# Allegro board PRISON_GOD_PCB_V235_SOMECHANGE.brd
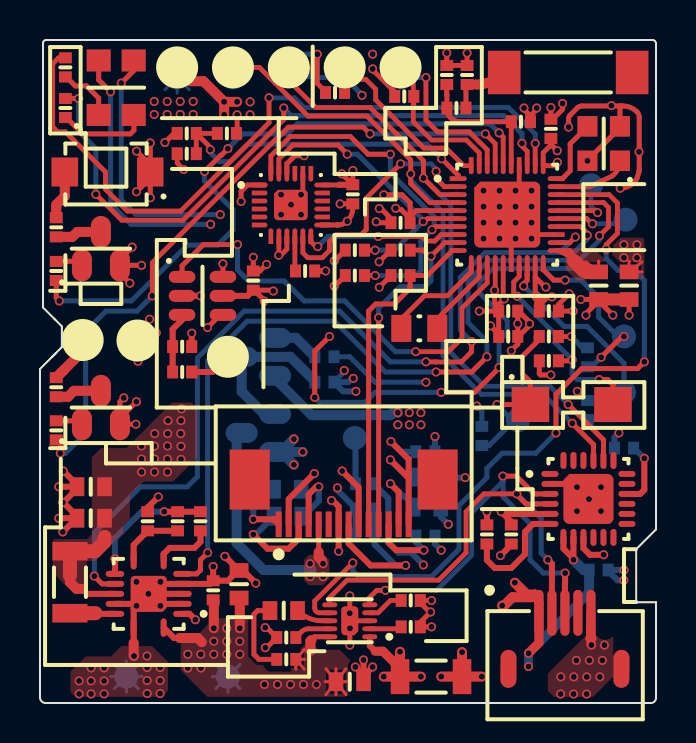
[diagram p0: board, top side]
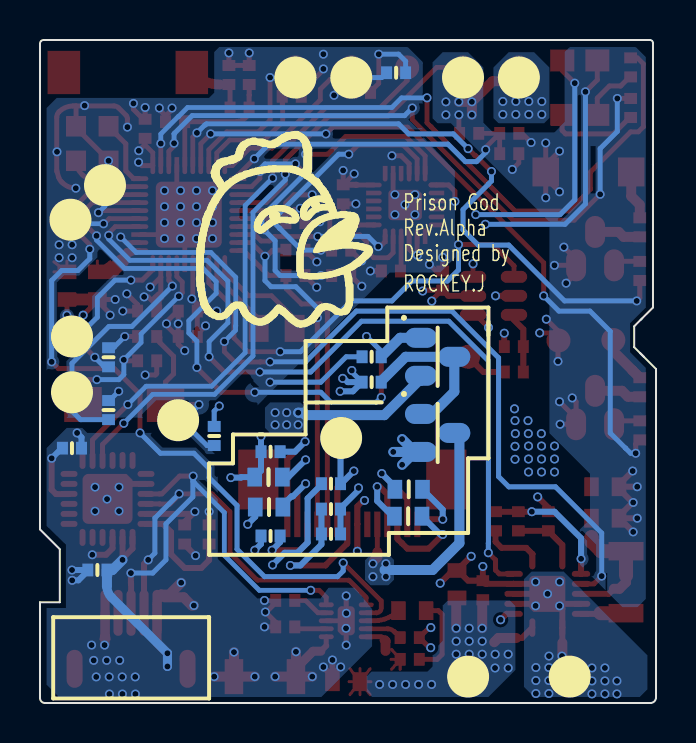
[diagram p1: board, bottom side, seen from below]

Outline 30.81 x 33.17 mm; copper layers: TOP, POWER SOURCE, GND, BOTTOM. Coordinates in mm from the lower left corner of the outline.
Outline path: 0.76,19.18 0.15,19.79 0.15,33.02 arc(0.2,33.13) 0.3,33.17 30.63,33.17 arc(30.76,33.12) 30.81,32.99 30.81,8.69 29.82,7.7 29.82,5.04 30.81,5.04 30.81,0.25 arc(30.74,0.07) 30.56,0 0.28,0 arc(0.08,0.08) 0,0.28 0,16.71 0.79,17.5 ; 0.71,19.23 1.09,18.85 1.09,17.81 0.61,17.32

## Design rules (mm)
constraint set DEFAULT: min track width 0.152

## Placement (name value [footprint] x y rotation side)
ANT  ANTENNA  [ANT700X200-2N]  26.42 31.55 0 top
BAT+  BAT+  [TESTPOINT120]  9.4 1.32 180 bottom
BAT-  BAT-  [TESTPOINT120]  4.32 1.32 180 bottom
C1  100n  [RESC_0402]  7.34 28.5 0 top
C2  2.2p  [RESC_0402]  20.83 29.77 180 top
C3  100n  [RESC_0402]  25.55 28.73 90 top
C4  1.0u  [RESC_0603]  29.46 20.88 90 top
C5  1.0u  [RESC_0402]  25.45 19.61 180 top
C6  100n  [RESC_0402]  25.45 18.34 0 top
C7  1.0u  [RESC_0402]  23.42 19.61 0 top
C8  100n  [RESC_0402]  23.42 18.34 0 top
C9  100n  [RESC_0402]  18.03 24.03 180 top
C10  0-75p  [RESC_0402]  7.11 17.83 0 top
C11  100n  [RESC_0402]  10.67 21.13 270 top
C12  1u  [RESC_0603]  12.37 10.69 180 bottom
C13  4.7u  [RESC_0603]  19.38 11.3 180 bottom
C14  1u  [RESC_0603]  12.4 9.35 180 bottom
C15  2.2u  [RESC_0603]  19.35 9.8 180 bottom
C16  4.7u  [RESC_0402]  16.26 9.7 180 bottom
C17  1u  [RESC_0603]  15.49 1.07 0 top
C18  4.7u  [RESC_0603]  9.96 5.94 90 top
C19  0.1u  [RESC_0402]  8.66 5.64 90 top
C20  10u  [RESC_0603]  2.54 9.25 0 top
C21  10u  [RESC_0603]  2.54 10.82 0 top
C22  100n  [RESC_0402]  13.26 21.62 0 top
C23  10UF  [RESC_1206]  19.56 1.32 180 top
C24  4.7u  [RESC_0402]  29.21 12.75 0 bottom
C25  100n  [RESC_0402]  23.57 8.43 90 top
C26  100n  [RESC_0402]  22.35 8.43 270 top
C27  1.0u  [RESC_0402]  27.94 6.65 180 bottom
C28  100n  [RESC_0402]  15.65 25.45 270 top
C29  100n  [RESC_0402]  19.28 12.57 0 bottom
C30  100n  [RESC_0402]  16.26 8.46 0 bottom
C31  100n  [RESC_0402]  27.38 14.66 270 bottom
C32  100n  [RESC_0402]  27.38 17.3 270 bottom
C33  100n  [RESC_0402]  18.22 30.35 0 top
C34  100n  [RESC_0402]  14.76 30.54 0 top
C35  100n  [RESC_0402]  22.1 13.36 270 bottom
C36  100n  [RESC_0402]  13 31.53 0 bottom
CHR_LED  LED  [RESC_0603]  12.19 4.62 180 top
DA_RES  BUTTON  [BUTTON300X400X200-2N]  26.59 14.94 0 top
EXT_3V_A  VCC_3V  [TESTPOINT120]  23.9 14.15 180 bottom
EXT_3V_B  VCC_3V  [TESTPOINT120]  15.24 31.29 180 bottom
INTA  INTA  [TESTPOINT120]  29.21 15.54 180 bottom
INTB  INTB  [TESTPOINT120]  29.21 18.34 180 bottom
INTC  INTC  [TESTPOINT120]  18.03 31.8 0 top
INTD  INTD  [TESTPOINT120]  15.24 31.8 0 top
J_GND  GND  [TESTPOINT120]  9.65 31.29 180 bottom
J_VCC  J_VCC  [TESTPOINT120]  6.86 31.29 180 bottom
L1  DNP  [RESC_0402]  21.36 31.42 90 top
L2  7.5n  [RESC_0402]  20.35 31.42 90 top
L3  3.9n  [RESC_0402]  24.05 29.08 0 top
L4  2.2u  [RESC_0603]  27.94 20.88 270 top
L5  4.7u  [RESC_1206]  1.5 6.05 90 top
LED  RED_GREEN  [RGB_COM_A_3528-4N]  3.81 30.78 90 top
NOREF  -  []  31.75 0.05 90 top
NOREF#2  -  []  0 0.05 0 top
NOREF#3  -  []  0.25 33.55 0 top
NOREF#4  -  []  0 0.05 0 top
PAD  PAD  [TESTPOINT120]  9.4 17.32 0 top
Q1  SI2302DS  [SOT95P237X112-3N]  3.05 22.73 90 top
Q2  SI2302DS  [SOT95P237X112-3N]  3.05 14.78 90 top
Q3  Si2301BDS  [SOT95P237X112-3N]  10.92 13.51 180 bottom
Q4  SI2302DS  [SOT95P237X112-3N]  10.92 17.32 180 bottom
R1  10k  [RESC_0402]  9.35 28.5 0 top
R2  10k  [RESC_0402]  7.34 27.48 0 top
R3  10k  [RESC_0402]  18.03 21.39 180 top
R4  10k  [RESC_0402]  18.03 22.66 180 top
R5  10k  [RESC_0402]  15.75 22.66 0 top
R6  10k  [RESC_0402]  15.75 21.39 0 top
R7  3K3  [RESC_0402]  25.45 17.12 0 top
R8  100  [RESC_0402]  0.81 23.8 270 top
R9  100  [RESC_0402]  0.81 15.8 270 top
R10  100  [RESC_0402]  1.27 31.8 90 top
R11  100  [RESC_0402]  1.27 29.77 90 top
R12  100  [RESC_0402]  0.81 21.62 90 top
R13  100  [RESC_0402]  0.81 13.64 90 top
R14  1-10k  [RESC_0402]  7.11 16.56 180 top
R15  47k  [RESC_0402]  14.22 16.05 180 bottom
R16  47k  [RESC_0402]  14.22 17.32 180 bottom
R17  10k  [RESC_0402]  16.26 10.97 180 bottom
R18  560k  [RESC_0402]  19.28 8.36 180 bottom
R19  500  [RESC_0402]  18.54 3.81 180 top
R20  250  [RESC_0402]  18.54 5.13 0 top
R21  10k  [RESC_0402]  12.32 3.28 180 top
R22  1.5k  [RESC_0402]  12.32 2.18 0 top
R23  158k  [RESC_0402]  8.03 9.09 90 top
R24  90k  [RESC_0402]  5.38 9.09 90 top
R25  15k  [RESC_0402]  6.88 9.09 270 top
RES  RES  [TESTPOINT120]  15.75 13.26 180 bottom
RXD  RX  [TESTPOINT120]  9.65 31.8 0 top
SOUNDER  R  [DET402_450X300-2N]  3.38 26.57 180 top
SWCLK  SWCLK  [TESTPOINT120]  27.56 25.91 180 bottom
SWDIO  SWDIO  [TESTPOINT120]  29.29 24.18 180 bottom
TXD  TX  [TESTPOINT120]  12.45 31.8 0 top
U1  DA14583_QFN40  [QFN40P500X500X80-41N]  23.37 24.43 0 top
U2  ASC0111B  [SOT95P237X292-6N]  8.13 20.37 0 top
U3  OLED_DIS_64_32  [FPC14N_1280X670X200-16N]  11.94 8.94 180 top
U4  BQ24050  [SON40P200X200X80-11N]  15.49 4.11 180 top
U5  TPS62736_PVQFN14  [QFN14P350X350X80-15N_DEBUG]  5.44 5.46 180 top
U6  MPU9250  [QFN24P300X300X100-25N_NEW]  12.55 24.92 0 top
U7  CP2104_QFN24  [QFN24P400X400X80-25N]  27.43 10.21 0 top
U_GND  GND  [TESTPOINT120]  6.86 31.8 0 top
USB  MICRO USB  [MICROUSB_NEW]  22.56 -0.89 0 top
VM+  VM+  [TESTPOINT120]  4.88 18.14 0 top
VM-  VM-  [TESTPOINT120]  2.13 18.16 0 top
VPP  VPP  [TESTPOINT120]  18.03 31.29 180 bottom
Y1  16MHZ  [OSCCC200X250X90-4N]  28.19 27.99 180 top
Y2  32KHZ  [OSCCC200X120X60-2N]  18.97 18.75 0 top

## Library data of the parts
ANT = ANTENNA_0
BAT+ BAT- EXT_3V_A EXT_3V_B INTA INTB INTC INTD J_GND J_VCC PAD RES RXD SWCLK SWDIO TXD U_GND VM+ VM- VPP = TEST POINT
C1-C22 C24-C36 = CAP NP
C23 = CAP
CHR_LED = LED
DA_RES = SW PUSHBUTTON
L1-L5 = INDUCTOR
LED = LED BI-COLOUR_0
Q1 Q2 Q4 = MOSFET_I_EN_GSD: room: motor
Q3 = Si2301BDS_0
R1-R25 SOUNDER = R
U1 = DA14583_QFN40
U2 = ASC0111B_0
U3 = OLED_DIS_64_0
U4 = BQ24050
U5 = TPS62736_PVQFN14_2
U6 = MPU9250_1
U7 = CP2104_QFN24_0
USB = MICROUSB_1
Y1 = CRYSTAL14_0
Y2 = CRYSTAL

## Footprints (pads in the part's own frame, mm; a bottom-side part is the same pattern mirrored in y, then rotated)
ANT700X200-2N
  rect 1.625x2.17 smd: 1(-3.2,0) 2(3.2,0)
BUTTON300X400X200-2N
  rect 1.875x1.75 smd: 1(-2.062,0) 2(2.062,0)
DET402_450X300-2N
  rect 1.325x1.45 smd: 1(-2.138,0) 2(2.138,0)
FPC14N_1280X670X200-16N
  rect 0.3x1.28 smd: 1(0,0) 2(-0.5,0) 3(-1,0) 4(-1.5,0) 5(-2,0) 6(-2.5,0) 7(-3,0) 8(-3.5,0) 9(-4,0) 10(-4.5,0) 11(-5,0) 12(-5.5,0) 13(-6,0) 14(-6.5,0)
  rect 2x3 smd: M1(-7.95,-2.24) M2(1.45,-2.24)
MICROUSB_NEW
  round 0 hole 0.6: (1.7,4.5) (5.7,4.5)
  oval 0.46x2.3 smd: 1(2.4,5.4) 2(3.05,5.4) 3(3.7,5.4) 4(4.35,5.4) 5(5,5.4)
  oval 1.9x0.8 smd rot 89.7: 6(6.525,2.6) 7(0.875,2.6)
OSCCC200X120X60-2N
  rect 1x1.35 smd: 1(-0.9,0) 2(0.9,0)
OSCCC200X250X90-4N
  rect 1x1.025 smd: 1(-0.812,0.863) 2(-0.812,-0.863) 3(0.812,-0.863) 4(0.812,0.863)
QFN14P350X350X80-15N_DEBUG
  oval 0.3x0.925 smd: 1(-0.75,1.688) 7(-0.75,-1.688) 8(0.75,-1.688) 14(0.75,1.688)
  oval 0.925x0.3 smd: 2(-1.688,1) 3(-1.688,0.5) 4(-1.688,0) 5(-1.688,-0.5) 6(-1.688,-1) 9(1.688,-1) 10(1.688,-0.5) 11(1.688,0) 12(1.688,0.5) 13(1.688,1)
  custom 1.8x1.8 smd: 15(0,0)
QFN24P300X300X100-25N_NEW
  custom 0.78x0.235 smd: 1(-1.563,1) 2(-1.563,0.6) 3(-1.563,0.2) 4(-1.563,-0.2) 5(-1.563,-0.6) 6(-1.563,-1) 13(1.563,-1) 14(1.563,-0.6) 15(1.563,-0.2) 16(1.563,0.2) 17(1.563,0.6) 18(1.563,1)
  custom 0.235x0.78 smd: 7(-1,-1.563) 8(-0.6,-1.563) 9(-0.2,-1.563) 10(0.2,-1.563) 11(0.6,-1.563) 12(1,-1.563) 19(1,1.563) 20(0.6,1.563) 21(0.2,1.563) 22(-0.2,1.563) 23(-0.6,1.563) 24(-1,1.563)
  custom 1.68x1.52 smd: 25(0,0)
QFN24P400X400X80-25N
  oval 0.85x0.3 smd: 1(-1.925,1.25) 2(-1.925,0.75) 3(-1.925,0.25) 4(-1.925,-0.25) 5(-1.925,-0.75) 6(-1.925,-1.25) 13(1.925,-1.25) 14(1.925,-0.75) 15(1.925,-0.25) 16(1.925,0.25) 17(1.925,0.75) 18(1.925,1.25)
  oval 0.3x0.85 smd: 7(-1.25,-1.925) 8(-0.75,-1.925) 9(-0.25,-1.925) 10(0.25,-1.925) 11(0.75,-1.925) 12(1.25,-1.925) 19(1.25,1.925) 20(0.75,1.925) 21(0.25,1.925) 22(-0.25,1.925) 23(-0.75,1.925) 24(-1.25,1.925)
  custom 2.5x2.5 smd: 25(0,0)
QFN40P500X500X80-41N
  custom 0.85x0.235 smd: 1(-2.45,1.8) 2(-2.45,1.4) 3(-2.45,1) 4(-2.45,0.6) 5(-2.45,0.2) 6(-2.45,-0.2) 7(-2.45,-0.6) 8(-2.45,-1) 9(-2.45,-1.4) 10(-2.45,-1.8) 21(2.45,-1.8) 22(2.45,-1.4) 23(2.45,-1) 24(2.45,-0.6) 25(2.45,-0.2) 26(2.45,0.2) 27(2.45,0.6) 28(2.45,1) 29(2.45,1.4) 30(2.45,1.8)
  custom 0.235x0.85 smd: 11(-1.8,-2.45) 12(-1.4,-2.45) 13(-1,-2.45) 14(-0.6,-2.45) 15(-0.2,-2.45) 16(0.2,-2.45) 17(0.6,-2.45) 18(1,-2.45) 19(1.4,-2.45) 20(1.8,-2.45) 31(1.8,2.45) 32(1.4,2.45) 33(1,2.45) 34(0.6,2.45) 35(0.2,2.45) 36(-0.2,2.45) 37(-0.6,2.45) 38(-1,2.45) 39(-1.4,2.45) 40(-1.8,2.45)
  custom 3.3x3.3 smd: 41(0,0)
RESC_0402
  rect 0.55x0.64 smd: 1(-0.477,0) 2(0.477,0)
RESC_0603
  rect 0.73x0.94 smd: 1(-0.69,0) 2(0.69,0)
RESC_1206
  rect 0.925x1.75 smd: 1(-1.55,0) 2(1.55,0)
RGB_COM_A_3528-4N
  rect 1.1x1.2 smd: 1(-1.363,0.875) 2(-1.363,-0.875) 3(1.363,-0.875) 4(1.363,0.875)
SON40P200X200X80-11N
  oval 0.75x0.24 smd: 1(-1,0.8) 2(-1,0.4) 3(-1,0) 4(-1,-0.4) 5(-1,-0.8) 6(1,-0.8) 7(1,-0.4) 8(1,0) 9(1,0.4) 10(1,0.8)
  custom 0.85x1.45 smd: 11(0,0)
SOT95P237X112-3N
  oval 1.6x1 smd: 1(-0.835,0.95) 2(-0.835,-0.95) 3(0.835,0)
SOT95P237X292-6N
  oval 1.325x0.6 smd: 1(-1.022,0.95) 2(-1.022,0) 3(-1.022,-0.95) 4(1.022,-0.95) 5(1.022,0) 6(1.022,0.95)
TESTPOINT120
  round 1.2 smd: 1(0,0)

## Nets
GND: BAT-.1 C1.1 C3.2 C4.2 C5.1 C6.2 C7.2 C8.2 C9.2 C10.2 C11.1 C13.1 C15.1 C16.2 C17.2 C18.2 C19.2 C20.1 C21.1 C22.2 C23.1 C24.1 C25.1 C26.1 C27.1 C28.1 C29.2 C30.1 C31.1 C32.1 C33.1 C34.1 C35.1 C36.1 J_GND.1 L1.2 L2.2 L3.2 Q1.2(S) Q2.2(S) Q4.2(S) R1.2 R7.1 R16.1 R18.1 R19.1 R20.2 R21.2 R24.2 U1.16 U1.23 U1.34 U1.41 U2.2 U2.4 U2.6 U3.7(VSS) U4.3(VSS) U4.11 U5.2 U5.3 U5.4 U5.5 U5.12(VSS) U5.14 U5.15 U6.18 U6.20 U6.25 U7.2 U7.25 U_GND.1 USB.5 USB.6 USB.7 Y1.2(GND_2) Y1.4
VBAT: BAT+.1 C17.1 C18.1 C19.1 J_VCC.1 Q3.2(S) R2.1 R15.1 R22.2 SOUNDER.1 U4.10 U5.1 VM+.1
VBAT_AD: C1.2 R1.1 R2.2 U1.1
VBUS: C23.2 C27.2 U4.1 U7.7 U7.8 USB.1(VBUS)
VCC_3V: C6.1 C7.1 C8.1 C9.1 C11.2 C16.1 C20.2 C21.2 C25.2 C28.2 C30.2 C35.2 C36.2 DA_RES.1 EXT_3V_A.1 EXT_3V_B.1 L5.2 LED.3 LED.4 R3.2 R4.2 R5.1 R6.1 R17.1 U1.5 U1.14 U1.15 U2.5(VDD) U3.8 U5.11 U6.1 U6.8(VDDIO) U6.9 U6.13 U6.22 U7.5 U7.9
VIN_OK: U1.22 U5.10
VIN_OK_SET: U1.24 U5.6
CHR_SET: U1.28 U4.7
D+: U4.5 U7.3 USB.3
D-: U4.6 U7.4 USB.2
DA_RST: DA_RES.2 R7.2 U1.17
I2C_SCL_1: R4.1 U1.9 U3.11
I2C_SCL_2: R5.2 U1.6 U6.23
I2C_SDA_1: R3.1 U1.10 U3.10
I2C_SDA_2: R6.2 U1.7 U6.24
INTA: C31.2 INTA.1 U1.18
INTB: C32.2 INTB.1 U1.20
INTC: C33.2 INTC.1 U1.39
INTD: C34.2 INTD.1 U1.40
LED1: R10.2 U1.32
LED2: R11.2 U1.33
MOTOR: R13.1 U1.37
MPU_FSYNC: U1.2 U6.11
MPU_INT: U1.8 U6.12
OLED_RES: R17.2 RES.1 U3.9
OLED_VBAT: Q3.3 U3.5
OLED_VBAT_SW: Q4.1 R16.2 U1.27
SOUNDER: R12.1 U1.36
SWCLK: SWCLK.1 U1.26
SWDIO: SWDIO.1 U1.25
TOUCH: U1.13 U2.1
UART_RX: RXD.1 U1.4 U7.21
UART_TX: TXD.1 U1.3 U7.20
VDCDC: C3.1 C4.1 C5.2 L4.2 U1.19 U1.31
VPP: U1.38 VPP.1
N650552: C2.2 L2.1 L3.1 U1.35
N650846: L4.1 U1.21
N657737: U1.11 Y2.1
N657743: U1.12(XTAL32KP) Y2.2
N658494: U1.29 Y1.1
N680797: ANT.1 C2.1 L1.1
N748992: R19.2 U4.2
N749044: R20.1 U4.4
N749072: R21.1 U4.9
N749104: CHR_LED.1(CATHODE) U4.8
N749108: CHR_LED.2 R22.1
N749358: L5.1 U5.13
N749416: R24.1 R25.2 U5.8
N749488: R23.2 R25.1 U5.9
N750591: C22.1 U6.10
N751124: R8.1 SOUNDER.2
N751136: R9.1 VM-.1
N751236: Q1.3 R8.2
N751248: Q2.3 R9.2
N751256: Q1.1 R12.2
N751260: Q2.1 R13.2
N752175: C12.2 U3.1
N752329: Q3.1 Q4.3 R15.2
N752341: C12.1 U3.2
N752385: C14.2 U3.3
N752391: C14.1 U3.4
N752429: R18.2 U3.12
N752435: C15.2 U3.13
N752441: C13.2 C29.1 U3.14
N753230: LED.1 R10.1
N753234: LED.2(YG_C) R11.1
N753932: C24.2 U7.16(VPP)
N754493: C10.1 R14.2 U2.3
N766501: PAD.1 R14.1
N768010: C26.2 U7.6
N788503: U1.30 Y1.3
N7492626: R23.1 U5.7

Pads without a net: ANT 2; U3 6 M1 M2; U6 2 3 4 5 6 7 14 15 16 17 19 21; U7 1 10 11 12 13 14 15 17 18 19 22 23 24; USB 4

## Via types
v1: diameter 0.45, hole 0.3, TOP to BOTTOM, 336 vias

## Routing (per net, layer and track width the routed paths; a pad name or vN(x,y) marks a point on that pad's centre or on a via; arc(x,y) is an arc through that point)
GND: length 146.8
  TOP w0.152: 27.76,3.18 USB.5 27.35,3.18 ; C4.2 29.46,22.11 ; C4.2 30.11,21.57 ; C4.2 30.11,22.07
  TOP w0.24: 17.72,30.53 17.72,30.59 ; 17.72,30.59 17.74,30.57 C33.1 ; 17.72,30.59 17.69,30.62 ; 16.64,31.75 v1(16.64,31.72) 16.64,31.67 17.69,30.62 ; U1.23 24.37,23.43 23.57,24.23 U1.16 ; 13.15,25.52 U6.20 ; C1.1 6.71,28.5 ; v1(13.87,32.46) 13.87,31 14.28,30.59 C34.1 ; U1.34 23.97,25.03 U1.41 ; 17.69,30.35 17.69,30.62 ; U6.18 14.98,25.92 ; U4.11 U4.3 ; R1.2 9.86,28.53 v1(9.86,29.43)
  TOP w0.25: v1(19.58,3.81) R19.1 19.02,4.04 v1(19.54,4.56) 19.48,4.56 19.02,5.02 R20.2 v1(19.58,5.13) ; v1(26.47,20.47) 25.93,19.93 C5.1 v1(26.67,19.61) ; Q1.2 4,22.2 v1(4.61,22.81) ; Q1.2 4,21.5 v1(4.5,21.01) ; Q1.2 v1(5.08,21.9) ; U2.4 9.01,19.42 v1(8.38,18.79) ; v1(15.5,2.9) 15.5,4.11 U4.11 15.5,4.12 v1(15.5,5.36) ; v1(4.8,13.95) Q2.2 4,14.25 ; 4,14.25 v1(4.83,15.08) ; 4,14.25 4,15.07 v1(4.19,15.27) ; v1(25.55,29.79) C3.2 25.64,29.2 26.14,29.7 v1(26.14,30) ; v1(10.67,22.3) C11.1 10.99,21.61 11.33,21.95 v1(11.33,21.95) ; C8.2 23.9,17.95 v1(23.57,17.63) ; C8.2 23.88,18.32 ; C8.2 23.94,18.34 24.49,18.89 v1(24.49,18.97) 24.49,19.06 23.94,19.61 C7.2 ; C8.2 v1(23.9,18.97) C7.2 ; C8.2 23.88,18.36 ; C7.2 23.88,19.59 ; C7.2 23.88,19.63 ; 29.01,29.87 29.15,29.87 arc(29.53,29.79) 29.86,29.57 arc(29.94,29.45) 29.97,29.31 29.97,26.66 arc(29.97,26.62) 29.96,26.58 29.87,26.29 arc(29.83,26.19) 29.76,26.1 29.69,26.04 arc(29.38,25.83) v1(29.02,25.76) ; 29.01,29.87 27.1,29.87 arc(26.98,29.85) 26.88,29.78 26.51,29.41 arc(26.46,29.33) 26.44,29.23 v1(26.44,28.81) ; 29.01,29.87 arc(29.01,29.87) 29.01,29.87 Y1.2 29.01,28.78 27.38,27.15 ; v1(15.65,26.65) 15.65,26.64 C28.1 v1(15.1,26.48) ; v1(16.97,24.74) 17.02,24.69 17.11,24.69 17.56,24.24 C9.2 16.87,24.03 v1(16.81,24.08) ; 24.53,29.37 24.53,29.38 24.84,29.69 v1(24.84,29.77) ; 24.53,29.37 24.21,29.69 v1(24.21,29.77) ; 24.53,29.37 L3.2 ; 6.71,28.5 v1(6.25,28.04) ; C6.2 v1(26.57,18.34) ; v1(25.55,16.41) 25.04,16.41 24.97,16.48 R7.1 ; v1(11.26,3.77) 11.34,3.77 R21.2 11.33,2.77 v1(11.27,2.77) ; v1(20.35,32.52) L2.2 L1.2 v1(21.36,32.52) ; U6.25 13.15,25.52 ; U2.6 v1(9.15,21.97) ; 23.57,24.23 U1.41
  TOP w0.3: C18.2 10.16,6.63 v1(10.79,5.99) ; C18.2 9.38,7.21 9.37,7.21 v1(9.25,7.34) ; C18.2 9.91,6.63 9.4,6.12 8.67,6.12 C19.2 ; v1(7.77,4.17) 7.48,4.46 U5.2 ; U5.3 5.94,4.96 U5.15 ; C21.1 1.85,10.72 1.18,10.05 ; C21.1 1.85,10.93 v1(1.17,11.61) ; C21.1 v1(0.94,10.82) ; C19.2 v1(8.66,6.83) ; C19.2 8.51,5.96 U5.5 5.94,5.96 U5.15 ; 4.94,4.96 U5.15 ; 4.94,4.96 4.69,4.71 U5.14 4.69,3.01 ; 4.94,4.96 U5.12 ; U5.15 U5.4 ; v1(1.14,10.03) 1.16,10.05 1.18,10.05 ; 16.18,1.35 16.18,1.39 ; 16.18,1.35 C17.2 ; 16.18,1.35 v1(16.64,1.8) ; 16.18,1.39 v1(15.77,1.8) ; 16.18,1.39 v1(16.18,2.15) ; 1.83,9.25 v1(0.94,9.25) ; 1.83,9.25 v1(1.14,8.56) ; 1.83,9.25 C20.1 1.85,9.35 1.18,10.02 1.18,10.05 ; v1(23.03,7.37) 23.57,7.92 C25.1 ; v1(27.38,27.13) 27.38,27.15 ; R24.2 5.38,9.78 v1(5.92,10.31) ; C28.1 14.99,25.93 14.98,25.92 ; U2.2 v1(8.03,20.37) ; v1(14.29,21.62) C22.2 ; U7.25 26.68,10.96 U7.2 ; v1(14.58,10.13) 14.64,10.13 14.94,9.83 U3.7 v1(14.94,7.59) ; C10.2 v1(7.59,18.5) ; C26.1 v1(22.35,9.58)
  TOP w0.45: v1(27.58,2.9) 27.56,2.96 USB.5
  TOP w0.5: v1(9.21,29.43) v1(9.21,30.08) ; v1(9.21,30.08) v1(9.86,30.08) ; v1(9.21,30.08) 8.18,31.11 7.55,31.11 U_GND.1 ; v1(20.07,1.32) C23.1 ; C23.1 v1(21.11,2.55) ; C23.1 v1(22.1,1.32) ; 4.69,3.01 4.69,2.37 v1(4.7,2.35)
  BOTTOM w0.152: BAT-.1 4.32,2.1 ; BAT-.1 4.92,1.92 ; BAT-.1 3.54,1.32 ; BAT-.1 4.92,0.72 ; BAT-.1 3.72,0.72 ; BAT-.1 4.32,0.54 ; BAT-.1 3.72,1.92 ; BAT-.1 5.1,1.32
  BOTTOM w0.25: v1(26.57,18.34) 27.08,17.83 ; 27.08,17.83 27.13,17.77 C32.1 ; 27.08,17.83 27.38,17.83 ; C31.1 27.34,15.13 v1(26.87,15.6) ; v1(21.84,14.86) 22.1,14.61 C35.1 22.15,13.84 22.15,13.89 ; C36.1 12.52,32.11 12.88,32.46 v1(13.87,32.46) ; v1(19.3,16.05) 16.76,16.05 15.49,17.32 R16.1 ; 19.76,11.98 19.76,12.05
  BOTTOM w0.3: v1(29.2,6.14) 28.89,6.14 28.42,6.61 C27.1 v1(29.21,6.65) ; 19.76,11.98 19.76,11.62 C13.1 20.74,11.3 20.76,11.28 v1(21.27,11.28) ; v1(19.76,13.34) C29.2 19.76,12.05 ; v1(14.88,10.76) 14.88,10.65 15.78,9.75 C16.2 C30.1 ; v1(28.96,13.51) 28.73,13.29 C24.1 28.73,12.71 ; v1(20.07,7.65) 19.76,7.96 R18.1 ; v1(20.42,8.94) 20.04,9.32 C15.1
  BOTTOM w0.5: 11.76,16.13 11.76,16.23 ; 11.76,16.23 13.59,14.4 17.53,14.4 17.65,14.52 v1(17.9,14.52) ; 11.76,16.23 Q4.2
  vias: v1(1.96,1.11) v1(1.96,0.46) v1(2.56,1.76) v1(2.56,1.11) v1(2.56,0.46) v1(3.21,1.76) v1(3.21,1.11) v1(3.21,0.46) v1(4.82,6.06) v1(4.82,4.86) v1(5.35,2.35) v1(5.36,1.78) v1(5.36,1.13) v1(5.36,0.48) v1(5.42,5.46) v1(6.02,6.06) v1(6.02,4.86) v1(6.01,1.78) v1(6.01,1.13) v1(6.01,0.48) v1(10.51,30.08) v1(10.51,29.43) v1(12.06,25.43) v1(12.06,24.43) v1(12.56,24.93) v1(13.06,25.43) v1(13.06,24.43) v1(15.49,4.49) v1(15.5,3.74) v1(16.64,32.46) v1(17.9,13.92) v1(18.47,14.53) v1(18.47,13.92) v1(19.05,14.53) v1(19.05,13.92) v1(22.18,25.64) v1(22.18,24.84) v1(22.18,24.04) v1(22.18,23.24) v1(22.98,25.64) v1(22.98,24.84) v1(22.98,24.04) v1(22.98,23.24) v1(23.78,25.64) v1(23.78,24.84) v1(23.78,24.04) v1(23.78,23.24) v1(24.58,25.64) v1(24.58,24.84) v1(24.58,24.04) v1(24.58,23.24) v1(26.05,1.31) v1(26.04,0.45) v1(26.7,1.31) v1(26.69,0.45) v1(26.86,10.8) v1(26.86,9.6) v1(26.82,2.13) v1(27.35,1.31) v1(27.34,0.45) v1(27.46,10.2) v1(27.47,2.13) v1(28,1.31) v1(28.06,10.8) v1(28.06,9.6) v1(28.12,2.13) v1(28.23,2.9) v1(28.58,29.89) v1(29.2,22.93) v1(29.2,22.28) v1(29.85,22.93) v1(29.85,22.28) v1(29.96,27.58)
VBAT: length 43.1
  TOP w0.152: C17.1 15.31,0.42 ; C17.1 14.3,1.71 ; C17.1 15.31,1.71 ; C17.1 14.26,1.07 ; C17.1 14.3,0.42 ; C17.1 14.8,1.71 ; C17.1 14.8,0.42 ; C17.1 15.35,1.07 ; R22.2 13.22,2.68 ; R22.2 13.22,1.69 ; R22.2 13.25,2.18 ; R22.2 12.8,1.69
  TOP w0.24: R2.1 6.86,27.02 v1(7.19,26.7)
  TOP w0.25: v1(5.82,18.52) 5.26,18.52 VM+.1 ; 5.52,26.92 v1(5.52,28.02) ; 5.52,26.92 SOUNDER.1 5.52,26.27 ; 5.52,26.92 v1(4.83,27.61) ; VM+.1 4.9,18.11 v1(4.9,17.09) ; VM+.1 4.88,18.59 v1(5.49,19.2) ; 13.58,3.15 13.74,3.31 U4.10 ; 5.52,26.27 v1(4.83,25.58) ; 5.52,26.27 v1(5.52,25.28)
  TOP w0.3: U5.1 6.7,3.25 6.98,3.25
  TOP w0.5: 13.52,2.61 13.52,3.1 13.58,3.15 ; v1(9.99,3.74) 9.99,5.22 C18.1 ; 6.98,3.25 7.88,3.25 8.09,3.04 ; C19.1 8.69,5.13 v1(8.69,3.74)
  BOTTOM w0.152: BAT+.1 10.18,1.32 ; BAT+.1 10,0.72 ; BAT+.1 8.8,1.92 ; BAT+.1 9.4,0.54 ; BAT+.1 8.62,1.32 ; BAT+.1 10,1.92 ; BAT+.1 8.8,0.72 ; BAT+.1 9.4,2.1 ; J_VCC.1 7.64,31.29 ; J_VCC.1 6.86,32.07 ; J_VCC.1 6.08,31.29 ; J_VCC.1 7.46,30.69 ; J_VCC.1 6.26,31.89 ; J_VCC.1 6.86,30.51 ; J_VCC.1 6.26,30.69 ; J_VCC.1 7.46,31.89
  BOTTOM w0.25: 14.7,16.06 15.21,16.57 v1(15.21,16.64)
  BOTTOM w0.3: v1(15.67,16.24) 15.61,16.24 15.42,16.06 14.7,16.06 R15.1 15.16,15.6 v1(15.8,15.6)
  BOTTOM w0.5: Q3.2 12.06,12.56 ; 12.06,12.56 v1(12.7,11.92) ; 12.06,12.56 v1(13.14,12.56) ; 12.06,12.56 v1(12.7,13.21)
  vias: v1(5.71,30.1) v1(5.71,29.45) v1(6.36,30.1) v1(6.36,29.45) v1(7.01,30.1) v1(7.01,29.45) v1(7.39,2.44) v1(7.39,1.75) v1(7.66,30.1) v1(7.66,29.45) v1(8.04,2.44) v1(8.05,1.75) v1(8.69,3.09) v1(8.69,2.44) v1(9.34,3.74) v1(9.34,3.09) v1(9.34,2.44) v1(9.99,3.09) v1(9.99,2.44) v1(11.23,0.93) v1(11.88,0.93) v1(12.53,0.93) v1(13.18,0.93) v1(13.83,0.93)
VBAT_AD: length 17.1
  TOP w0.24: R2.2 C1.2 ; C1.2 8.52,27.8 v1(8.52,27.69) ; C1.2 R1.1 ; v1(20.09,27.23) 20.92,26.4 U1.1
  BOTTOM w0.25: v1(8.52,27.69) 8.52,27.54 8.97,27.09 9.53,27.09 10.41,27.96 19.36,27.96 v1(20.09,27.23)
VBUS: length 21.3
  TOP w0.25: 16.49,2.86 U4.1
  TOP w0.3: 26.68,7.23 26.18,7.73 U7.7 ; 26.68,7.23 U7.8 ; 26.68,7.23 v1(26.68,7.16) ; 16.76,2.59 16.49,2.86
  TOP w0.45: 18.01,1.73 17.15,2.59 16.76,2.59 ; v1(24.44,2.49) 24.96,3.01 USB.1 24.96,4.96 arc(24.9,5.23) 24.75,5.45 ; 24.32,5.45 24.75,5.45 ; 24.75,5.45 24.59,5.29
  TOP w0.5: C23.2 v1(18.01,2.56) ; C23.2 v1(17.19,1.32) ; C23.2 v1(19.05,1.32) ; v1(23.11,4.88) 23.21,4.88 23.63,5.29 24.59,5.29 ; v1(23.75,6.02) 24.32,5.45
  BOTTOM w0.45: v1(24.44,1.83) v1(24.44,2.49) 27.24,5.29 arc(27.4,5.54) 27.46,5.83
  BOTTOM w0.5: v1(26.68,7.16) 27.19,6.65 C27.2 27.46,5.83
VCC_3V: length 91
  TOP w0.24: 18.51,24.22 18.57,24.27 18.57,24.39 18.81,24.63 U1.5 ; v1(23.22,20.22) 23.17,20.27 U1.15 ; U6.8 11.95,22.41 v1(11.94,22.4) 12.05,22.4 12.35,22.7 U6.9 ; U6.22 12.35,26.98 12.35,26.99 ; U1.14 22.77,20.79 22.74,20.76 v1(22.74,20.64) 22.74,20.02 22.94,19.82
  TOP w0.25: 12.35,26.99 12.75,27.38 v1(13.21,27.38) ; R3.2 v1(16.97,20.8) ; v1(14.72,22.12) 14.73,22.12 R5.1 ; 22.94,18.46 v1(22.53,18.87) ; 22.94,18.46 C8.1 ; 22.94,18.46 C7.1 ; 22.92,19.63 C7.1 ; C7.1 v1(21.97,19.61) ; C7.1 22.94,19.94 v1(23.22,20.22) ; v1(11.21,20.11) 11.21,20.15 10.71,20.66 ; v1(22.86,14.94) DA_RES.1 24.53,16.06 24.13,16.46 24.13,17.35 24.82,18.04 24.82,18.29 ; 24.82,18.29 24.82,18.34 ; 24.82,18.29 24.87,18.34 C6.1 ; v1(17.2,25.43) 18.11,25.43 18.51,25.02 18.51,24.31 ; v1(15.01,24.97) C28.2 15.65,24.78 arc(15.57,24.41) v1(15.37,24.1) arc(15.16,23.97) 14.92,23.92 U6.13 14.05,23.92 ; v1(4.06,31.01) 4.69,31.63 LED.3 ; v1(3.53,30.58) 2.94,31.18 LED.4 ; v1(11.67,20.61) 11.63,20.66 10.71,20.66 ; 10.71,20.66 C11.2 ; 11.25,25.92 U6.1 10.37,25.92 10.06,25.6 v1(10.06,25.1) ; C9.1 18.51,24.31 ; R6.1 14.74,20.85 v1(14.72,20.85) ; v1(16.96,22.07) 17.36,22.47 17.37,22.47 R4.2 ; 18.51,24.31 18.44,24.31 18.06,24.69 17.86,24.69 v1(17.79,24.75)
  TOP w0.3: v1(18.29,6.88) 16.54,6.88 15.44,7.98 U3.8 ; U7.9 27.18,7.74 27.51,7.42 v1(28.19,7.42) ; 2.11,5.71 2.36,5.46 U5.11 ; C11.2 10.38,20.37 U2.5 ; U7.5 24.01,9.46 24.01,9.46 23.18,9.46 ; 23.18,9.46 v1(23.06,9.58) ; 23.18,9.46 23.57,9.07 C25.2
  TOP w0.5: 2.11,5.71 1.83,5.71 1.5,6.05 1.5,6.38
  TOP w0.7: 3.23,8.3 3.23,8.29 3.23,8.07 2.75,7.6 L5.2 1.5,6.38
  BOTTOM w0.25: C35.2 22.46,12.88 23.72,14.15 ; v1(22.86,14.94) 22.86,14.91 23.62,14.15 23.72,14.15 ; EXT_3V_A.1 23.72,14.15 ; C36.2 13.72,31.29 EXT_3V_B.1 16.1,30.43 v1(16.1,30.4) ; v1(8.53,23.95) 4.55,23.95 3.53,24.97 v1(3.53,30.58) ; v1(9.02,24.43) 4.8,24.43 4.06,25.17 v1(4.06,31.01)
  BOTTOM w0.3: R17.1 16.73,10.93 17.42,10.24 17.42,8.03 17.93,7.52 18.57,7.52 v1(19.18,6.91) ; v1(18.29,6.88) 17.79,6.88 16.73,7.94 C30.2 C16.1
  vias: v1(5.08,12.86) v1(5.08,12.21) v1(5.08,11.56) v1(5.74,13.48) v1(5.73,12.86) v1(5.73,12.21) v1(5.73,11.56) v1(6.4,14.13) v1(6.39,13.48) v1(6.38,12.86) v1(6.38,12.21) v1(6.38,11.56) v1(7.08,14.72) v1(7.05,14.13) v1(7.04,13.48) v1(7.05,12.84) v1(7.05,12.19)
VIN_OK: length 43.2
  TOP w0.24: U1.22 26.5,23.03 v1(26.77,23.31) ; v1(21.59,18.08) 21.59,17.58 21.08,17.07 21.06,17.07 21.06,17.06 19.79,17.06 19.78,17.07 v1(19.3,17.07)
  TOP w0.25: U5.10 3.11,5.96 v1(2.72,6.35)
  BOTTOM w0.24: v1(26.77,23.31) 26,22.54 22.26,22.54 21.02,21.3 21.02,18.86 21.03,18.85 21.03,18.64 v1(21.59,18.08)
  BOTTOM w0.25: v1(19.3,17.07) 17.53,17.07 14.99,19.61 10.21,19.61 7.87,17.27 7.87,11.33 7.36,10.81 5.02,10.81 2.72,8.51 v1(2.72,6.35)
VIN_OK_SET: length 40.8
  TOP w0.24: v1(27.37,23.4) 27.37,23.51 27.04,23.83 U1.24
  TOP w0.25: v1(22.35,17.32) 21.59,16.56 v1(19.81,16.56) ; U5.6 7.84,6.46 8.03,6.65 8.03,7.16 v1(8.39,7.52)
  BOTTOM w0.24: v1(27.37,23.4) 27.37,23.21 26.31,22.15 22.45,22.15 21.41,21.11 21.41,19.02 22.35,18.08 v1(22.35,17.32)
  BOTTOM w0.25: v1(19.81,16.56) 17.27,16.56 14.73,19.1 10.36,19.1 8.38,17.12 8.38,8 8.39,8 v1(8.39,7.52)
CHR_SET: length 38.8
  TOP w0.24: U4.7 13.98,4.51 arc(13.81,4.58) 13.74,4.75 13.74,5.11 v1(15.65,7.01) ; v1(28.32,22.71) 28.32,22.94 28.88,23.49 28.88,25.02 28.46,25.43 U1.28
  TOP w0.25: v1(25.81,13.51) 25.81,15.44 27.09,16.73 29.89,16.73 v1(30.23,17.07)
  BOTTOM w0.25: v1(28.32,22.71) 28.32,22.23 28.91,21.64 29.72,21.64 30.23,21.14 v1(30.23,17.07) ; v1(25.81,13.51) 24.79,12.5 23.11,12.5 22.35,11.73 22.35,11.28 20.96,9.88 20.96,7.7 19.58,6.32 15.93,6.32 15.65,6.61 v1(15.65,7.01)
D+: length 22.4
  TOP w0.24: U4.5 16.49,5.29 16.85,5.64 v1(17.27,5.64)
  TOP w0.25: U7.3 24.83,10.46 24.83,10.46 24.71,10.46 23.83,11.35 v1(23.15,11.35)
  TOP w0.3: v1(26.26,6.5) 26.26,6 26.26,5.99 USB.3
  BOTTOM w0.24: 23.09,11.02 21.59,9.53 21.59,7.39 19.84,5.64 v1(17.27,5.64)
  BOTTOM w0.25: 23.09,11.02 23.15,11.09 v1(23.15,11.35) 23.16,11.34 23.16,10.31 24.51,8.97 24.51,7.16 25.17,6.5 v1(26.26,6.5)
D-: length 21.7
  TOP w0.24: v1(23.85,10.46) 22.2,10.46 21.31,9.58 21.31,7.52 19.94,6.15 15.36,6.15 14.49,5.28 U4.6
  TOP w0.25: U7.4 24.83,9.96 24.83,9.96 24.31,9.96 23.85,10.41 v1(23.85,10.46)
  TOP w0.3: v1(25.4,7.16) 25.61,6.96 USB.2
  BOTTOM w0.25: v1(23.85,10.46) 25.06,9.25 25.06,7.5 v1(25.4,7.16)
DA_RST: length 10.8
  TOP w0.24: U1.17 23.97,21.56 23.97,21.55 23.97,21.34 23.69,21.07 23.69,20.53 v1(23.87,20.35)
  TOP w0.25: v1(26.62,17.17) 26.57,17.12 R7.2 ; DA_RES.2 28.66,15.93 28.41,16.18 v1(27.97,16.18)
  BOTTOM w0.24: v1(23.87,20.35) 25.76,18.46 25.76,18.03 v1(26.62,17.17)
  BOTTOM w0.25: v1(27.97,16.18) 26.87,16.18 26.62,16.43 v1(26.62,17.17)
I2C_SCL_1: length 18
  TOP w0.24: v1(19.56,22.35) 20.24,23.03 U1.9
  TOP w0.25: v1(19.56,22.35) 19.48,22.35 19.18,22.66 R4.1 ; v1(16.94,19.28) U3.11
  BOTTOM w0.25: v1(19.56,22.35) 19.56,21.13 19.25,20.83 18.01,20.83 16.94,19.76 v1(16.94,19.28)
I2C_SCL_2: length 15.2
  TOP w0.24: 14.91,27.91 12.65,27.91 11.95,27.22 U6.23 ; U1.6 19.38,24.23 19.24,24.09 v1(19.16,24.09)
  TOP w0.25: v1(16.76,22.66) R5.2 ; 14.91,27.91 v1(15.37,27.46)
  BOTTOM w0.24: v1(19.16,24.09) 19.16,24.17 18.83,24.51
  BOTTOM w0.25: 18.83,24.51 15.87,27.46 v1(15.37,27.46) ; v1(16.76,22.66) 17.73,22.66 18.82,23.75 18.83,23.75 v1(19.16,24.09)
I2C_SDA_1: length 16.8
  TOP w0.24: R3.1 19.37,21.39 20.62,22.63 U1.10
  TOP w0.25: U3.10 16.44,19.07 16.44,19.07 16.44,19.49 16.44,19.49 16.44,19.61 16.79,19.96 17.73,19.96 18.49,20.73 18.49,20.79 18.51,20.81 R3.1
I2C_SDA_2: length 18.9
  TOP w0.24: 15.52,28.35 12.52,28.35 11.55,27.37 U6.24 ; v1(19.61,23.68) 19.76,23.83 U1.7
  TOP w0.25: 15.52,28.35 16.41,27.46 v1(17.53,27.46) ; v1(16.76,21.39) R6.2
  BOTTOM w0.25: v1(16.76,21.39) 18.8,21.39 19.05,21.64 19.05,23.12 v1(19.61,23.68) 19.71,23.78 19.71,24.34 17.53,26.52 v1(17.53,27.46)
INTA: length 12.2
  TOP w0.25: v1(24.19,20.86) 24.19,20.97 24.36,21.14 24.36,21.39 24.37,21.39 24.37,21.47 24.37,21.48 U1.18
  BOTTOM w0.25: C31.2 28.78,14.18 29.24,14.63 29.24,15.52 INTA.1 29.21,16.99 27.36,18.84 26.21,18.84 v1(24.19,20.86)
INTB: length 9
  TOP w0.25: U1.20 25.17,21.68 25.69,21.16 v1(26.26,21.16) ; v1(28.07,17.3) 29.11,18.34 v1(29.21,18.34)
  BOTTOM w0.25: C32.2 27.59,16.82 27.64,16.87 ; 27.64,16.87 v1(28.07,17.3) ; 27.64,16.87 27.38,16.87 ; v1(26.26,21.16) 27.06,21.16 27.94,20.28 27.94,19.3 28.91,18.34 v1(29.21,18.34)
INTC: length 8.1
  TOP w0.235: 18.75,29.01 19.58,28.17 21.33,28.17 21.97,27.53 U1.39
  TOP w0.24: 18.67,29.79 18.67,31.16 INTC.1 ; 18.67,29.79 18.67,29.08 18.75,29.01 ; 18.67,29.79 18.7,29.82 C33.2
INTD: length 10.2
  TOP w0.235: 20.06,27.76 20.31,27.76 21.19,26.88 U1.40
  TOP w0.24: 20.06,27.76 19.2,27.76 16.79,30.18 16.79,30.71 16.3,31.2 15.84,31.2 INTD.1 15.23,31.79 C34.2
  TOP w0.25: 15.24,31.55 INTD.1
LED1: length 35.7
  TOP w0.24: v1(24.77,27.99) U1.32 ; v1(11.46,30.28) 11.46,29.03 11.25,28.82 11.24,28.82 7.04,24.61 4.37,24.61 3.28,25.7 3.28,26.57 1.27,28.57 0.89,28.57 0.64,28.82 0.64,31.98 0.93,32.28 R10.2
  BOTTOM w0.24: v1(11.46,30.28) 12.73,30.28 13.21,29.79 23.43,29.79 23.88,29.34 23.89,29.34 24.77,28.47 v1(24.77,27.99)
LED2: length 32.6
  TOP w0.24: v1(2.79,25.45) 4.09,24.16 7.16,24.16 12.19,29.19 v1(12.19,29.77) ; U1.33 24.37,27.6 24.1,27.86 v1(24.1,28)
  TOP w0.25: R11.2 v1(1.94,30.25)
  BOTTOM w0.25: v1(12.19,29.77) 12.57,29.39 23.2,29.39 24.07,28.52 arc(24.08,28.5) 24.1,28.49 arc(24.1,28.48) 24.1,28.48 v1(24.1,28) ; v1(2.79,25.45) 2.79,27.74 1.94,28.6 v1(1.94,30.25)
MOTOR: length 34.6
  TOP w0.24: U1.37 22.77,27.98 v1(22.28,28.47) ; v1(5.62,20.37) 5.62,22.03 11.84,28.25 11.92,28.3 12.42,28.81 16.17,28.81 v1(16.51,28.47)
  TOP w0.25: R13.1 1.02,12.96 v1(1.02,12.5)
  BOTTOM w0.25: v1(1.02,12.5) 1.27,12.5 1.52,12.75 1.53,12.75 2.29,13.51 2.29,18.59 3.3,19.61 4.86,19.61 v1(5.62,20.37) ; v1(22.28,28.47) v1(16.51,28.47)
MPU_FSYNC: length 12.6
  TOP w0.24: v1(18.03,26.97) 16.32,25.26 16.32,23.68 16.05,23.42 14.81,23.42 14.48,23.09 14.48,22.64 14.12,22.28 13.4,22.28 13.15,22.53 U6.11 ; U1.2 20.23,25.83 19.81,26.25 v1(19.81,26.59)
  BOTTOM w0.24: 19.81,26.72 19.56,26.97 v1(18.03,26.97)
  BOTTOM w0.25: v1(19.81,26.59) 19.81,26.72
MPU_INT: length 8.2
  TOP w0.24: v1(13.89,22.83) 13.8,22.83 13.55,23.08 U6.12 13.55,23.42 ; v1(16.92,23.34) 19.1,23.34 19.33,23.11 19.75,23.11 20.07,23.43 U1.8
  BOTTOM w0.25: v1(13.89,22.83) 14.4,23.34 v1(16.92,23.34)
OLED_RES: length 6.2
  TOP w0.3: U3.9 15.94,10.78 v1(15.11,11.61)
  BOTTOM w0.3: v1(15.11,11.61) 15.7,11.02 15.78,11.02 ; 15.78,11.02 R17.2 ; 15.78,11.02 15.78,13.19 RES.1
OLED_VBAT: length 11.8
  TOP w0.25: 13.94,7.55 U3.5
  TOP w0.5: 13.94,7.55 13.94,7.3 14.1,7.14
  BOTTOM w0.5: Q3.3 9.83,13.26 9.83,8 11.18,6.65 13.58,6.65
  vias: v1(13.51,6.97) v1(13.51,6.32) v1(14.16,6.97) v1(14.16,6.32)
OLED_VBAT_SW: length 33.5
  TOP w0.24: v1(27.98,23.38) 28.43,23.82 28.43,24.79 28.19,25.03 U1.27
  TOP w0.25: v1(22.96,16.79) 22.96,16.77 21.74,15.54 v1(20.07,15.54) ; v1(14.48,18.34) 13.74,17.6 v1(13.74,15.29)
  BOTTOM w0.24: v1(27.98,23.38) 27.98,23.16 26.57,21.74 22.66,21.74 22,21.08 22,20.5 23.37,19.13 23.37,18.51 22.96,18.1 v1(22.96,16.79)
  BOTTOM w0.25: v1(13.74,15.29) 13.99,15.04 16.26,15.04 16.76,15.54 v1(20.07,15.54) ; v1(14.48,18.34) 13.75,17.61 R16.2
  BOTTOM w0.5: R16.2 12.8,18.27 Q4.1
SOUNDER: length 32.4
  TOP w0.24: U1.36 23.17,28.32 v1(22.96,28.52)
  TOP w0.25: R12.1 0.81,20.27 v1(0.97,20.12) ; v1(8.23,26.59) 9.04,27.4 9.06,27.4 v1(9.4,27.74)
  BOTTOM w0.25: v1(8.23,26.59) 8.23,26.12 8.38,25.96 8.38,25.96 9.65,24.69 9.65,23.67 8.89,22.91 7.37,22.91 4.57,20.12 v1(0.97,20.12) ; v1(22.96,28.52) 22.56,28.92 22.54,28.92 22.48,28.98 12.87,28.98 12.37,28.47 10.13,28.47 v1(9.4,27.74)
SWCLK: length 3.6
  TOP w0.24: U1.26 27.79,24.63 v1(27.89,24.53)
  BOTTOM w0.24: v1(27.89,24.53) 27.56,24.86 SWCLK.1
SWDIO: length 3.7
  TOP w0.24: U1.25 27.35,24.23 27.6,23.98 v1(27.63,23.98)
  BOTTOM w0.24: v1(27.63,23.98) 29.08,23.98 SWDIO.1
TOUCH: length 22.5
  TOP w0.24: v1(18.8,17.58) 20.42,17.58 21.11,18.26 21.11,19.76 22.37,21.02 U1.13
  TOP w0.25: v1(9.88,22.94) 8.17,22.94 7.11,21.87 U2.1
  BOTTOM w0.25: v1(9.88,22.94) 9.88,21.67 10.43,21.11 12.21,21.11 13.21,20.12 15.24,20.12 17.78,17.58 v1(18.8,17.58)
UART_RX: length 34.7
  TOP w0.24: RXD.1 10.97,31.8 13.41,29.36 16.35,29.36 18.53,27.18 18.53,27.16 18.54,27.15 v1(18.54,26.47) 18.54,25.99 19.5,25.03 U1.4
  TOP w0.25: v1(26.62,14) 27.68,12.93 U7.21
  BOTTOM w0.24: v1(26.62,14) 25.17,15.44 22.08,15.44 20.16,17.36 20.16,24.55 18.54,26.16 v1(18.54,26.47)
UART_TX: length 31.8
  TOP w0.24: U1.3 20.01,25.43 v1(19.18,26.26) 19.18,27.13 16.51,29.79 13.79,29.79 12.45,31.14 TXD.1
  TOP w0.25: v1(26.42,14.94) 28.18,13.17 28.18,12.81 28.18,12.81 U7.20
  BOTTOM w0.24: v1(19.18,26.26) 20.55,24.89 20.55,17.53 22.23,15.85 25.5,15.85 v1(26.42,14.94)
VDCDC: length 12
  TOP w0.24: U1.31 25.17,27.53 25.57,27.93 ; 24.77,21.31 U1.19
  TOP w0.25: U1.31 25.71,26.88 v1(25.88,27.05) ; 24.82,20.36 24.77,20.41 24.77,21.31 25.26,20.81 v1(25.3,20.81) ; v1(27.05,20.19) L4.2 27.94,20.12 27.3,19.48 v1(27.3,19.41) ; v1(25.87,27.63) 25.57,27.93 25.57,28.23 C3.1 ; 28.05,20.19 28.05,20.01 v1(28.65,19.41) ; 24.97,19.89 25.4,20.32 v1(25.6,20.32) ; C4.1 v1(29.46,19.41)
  TOP w0.5: 24.82,20.36 24.97,20.2 C5.2
  TOP w0.6: L4.2 C4.1
VPP: length 7.9
  TOP w0.24: v1(19.3,31.29) 19.3,29.16 19.89,28.57 21.47,28.57 22.37,27.68 U1.38
  BOTTOM w0.25: VPP.1 v1(19.3,31.29)
N650552: length 7
  TOP w0.24: U1.35 23.57,29.06 L3.1
  TOP w0.25: L2.1 20.35,30.42 20.35,30.41 C2.2 20.35,29.72 arc(20.54,29.27) 20.99,29.08 L3.1
N650846: length 5.4
  TOP w0.152: 26.42,22.49 U1.21 26.42,22.34 ; 27.29,22.07 L4.1 27.94,22.11
  TOP w0.25: U1.21 26.5,22.63 26.61,22.52 26.61,22.34 arc(26.64,22.22) 26.71,22.11
  TOP w0.7: L4.1 27.38,21.57 arc(27.26,21.59) 27.16,21.66 26.71,22.11
N657737: length 5.4
  TOP w0.24: Y2.1 18.07,19.22 19.23,20.38 20.38,20.38 21.57,21.57 U1.11
N657743: length 4.1
  TOP w0.24: Y2.2 19.87,19.22 21.97,21.31 U1.12
N658494: length 3.8
  TOP w0.24: U1.29 27.5,25.83 28.62,26.36 28.69,26.42 arc(28.92,26.74) Y1.1
N680797: length 3.2
  TOP w0.25: 21.82,30.94 L1.1 arc(21.32,30.88) 21.31,30.81 C2.1
  TOP w0.5: ANT.1 23.17,31.5 arc(22.55,31.09) 21.82,30.94
N748992: length 1.6
  TOP w0.24: R19.2 17.97,3.71 U4.2
N749044: length 1.8
  TOP w0.24: R20.1 17.53,5.13 16.91,4.51 U4.4
N749072: length 1.9
  TOP w0.24: U4.9 13.44,3.71 arc(13.25,3.68) 13.09,3.57 R21.1
N749104: length 1.7
  TOP w0.24: U4.8 14.11,4.11 arc(14.02,4.12) 13.93,4.12 arc(13.9,4.13) 13.88,4.13 arc(13.34,4.29) CHR_LED.1
N749108: length 4.1
  TOP w0.25: R22.1 10.95,2.18 10.7,2.43 10.7,4.44 10.88,4.62 CHR_LED.2
N749358: length 2.3
  TOP w0.3: 2.77,4.5 2.81,4.46 U5.13
  TOP w0.7: 2.77,4.5 L5.1
N749416: length 3.3
  TOP w0.3: R25.2 R24.1 5.38,8.61 4.69,7.91 U5.8
N749488: length 6.6
  TOP w0.3: v1(3.75,7.21) U5.9 ; R23.2 R25.1 v1(6.21,9.57)
  BOTTOM w0.3: v1(6.21,9.57) 5.07,9.57 3.75,8.24 v1(3.75,7.21)
N750591: length 1.7
  TOP w0.24: C22.1 12.75,21.7 U6.10
N751124: length 2.5
  TOP w0.5: R8.1 0.81,24.93 1.24,25.36 SOUNDER.2
N751136: length 3
  TOP w0.5: 1.19,16.66 2.13,17.6 VM-.1 ; 1.19,16.66 0.84,16.31 0.84,16.28 ; 1.19,16.66 1.19,16.65 R9.1
N751236: length 2.3
  TOP w0.5: R8.2 1.62,23.32 1.87,23.57 Q1.3
N751248: length 2.4
  TOP w0.5: Q2.3 3.04,15.62 1.7,15.62 1.4,15.32 R9.2 0.76,15.32
N751256: length 1.4
  TOP w0.25: R12.2 0.82,22.1 1.9,22.1 Q1.1
N751260: length 1.4
  TOP w0.25: R13.2 1.93,14.12 Q2.1
  TOP w0.3: Q2.1 2.1,13.93
N752175: length 3.3
  TOP w0.3: v1(10.67,9.19) 11.68,9.19 U3.1
  BOTTOM w0.3: v1(10.67,9.19) 10.67,9.68 C12.2
N752329: length 8.2
  BOTTOM w0.5: R15.2 13.75,16.1 12.52,17.32 Q4.3 10.09,15.58 11.2,14.46 Q3.1 11.89,14.46
N752341: length 4.1
  TOP w0.3: v1(13.72,11.48) 12.44,10.2 U3.2
  BOTTOM w0.3: C12.1 13.06,10.82 v1(13.72,11.48)
N752385: length 4.9
  TOP w0.3: v1(10.67,8.43) 11.38,7.72 12.43,7.72 12.71,8 12.71,8 12.89,8.18 12.89,8.18 12.94,8.22 U3.3
  BOTTOM w0.3: v1(10.67,8.43) 10.79,8.43 C14.2
N752391: length 4.1
  TOP w0.3: v1(13.94,10.82) 13.82,10.82 13.44,10.44 U3.4
  BOTTOM w0.3: C14.1 13.18,9.35 13.94,10.11 v1(13.94,10.82)
N752429: length 3.7
  TOP w0.3: U3.12 17.44,8.02 17.82,7.65 v1(19.2,7.65)
  BOTTOM w0.3: R18.2 18.8,8.05 v1(19.2,7.65)
N752435: length 3.9
  TOP w0.3: U3.13 17.94,10.56 v1(17.53,10.97)
  BOTTOM w0.3: v1(17.53,10.97) 18.16,10.34 18.24,10.34 18.66,9.91 C15.2
N752441: length 8.9
  TOP w0.3: v1(17.55,13.08) 18.44,12.19 18.44,11.25 ; U3.14 18.44,11.25 ; 18.44,11.25 v1(17.53,12.17)
  BOTTOM w0.3: 18.8,12.47 C29.1 18.06,12.57 v1(17.55,13.08) ; v1(17.53,12.17) 18.39,11.3 C13.2
N753230: length 2.9
  TOP w0.25: LED.1 2.94,30.26 2.33,30.87 1.77,30.87 1.31,31.32 R10.1
N753234: length 4.6
  TOP w0.25: R11.1 1.31,29.29 2.13,28.47 4.52,28.47 4.7,28.65 4.7,29.41 LED.2
N753932: length 3.3
  TOP w0.3: v1(30.23,12.24) 30.23,10.67 30.01,10.46 29.36,10.46 U7.16
  BOTTOM w0.3: C24.2 29.72,12.75 v1(30.23,12.24)
N754493: length 3.1
  TOP w0.3: R14.2 C10.1 6.63,18.7 7.11,19.17 U2.3
N766501: length 2.1
  TOP w0.3: PAD.1 8.64,16.56 R14.1
N768010: length 5.7
  TOP w0.3: U7.6 24.66,8.96 24.26,8.56 24.26,7.44 23.57,6.76 22.74,6.76 22.35,7.15 C26.2
N788503: length 3.4
  TOP w0.25: U1.30 26.13,26.23 26.52,26.63 26.52,27.98 27.38,28.84 Y1.3
N7492626: length 3
  TOP w0.3: R23.1 8.03,8.06 7.73,7.76 6.49,7.76 6.19,7.46 U5.7

## Copper pours and planes (outline as drawn; the poured copper is in the pictures)
GND on TOP: 4.06,2.84 3.56,2.34 2.29,2.34 1.52,1.57 1.52,0.56 1.78,0.3 6.1,0.3 6.4,0.61 6.4,2.06 5.61,2.84
GND on TOP: 28.98,21.23 28.98,22.07 28.63,22.43 28.63,23.09 28.83,23.29 30.12,23.29 30.23,23.19 30.23,21.29 30.1,21.16 29.06,21.16
GND on TOP: 27.28,3.35 28.58,3.35 28.68,3.25 28.68,1.32 27.66,0.3 25.7,0.3 25.4,0.61 25.4,1.47
GND on BOTTOM: 28.7,13.77 29.46,13.77 30.48,12.75 30.48,8.86 29.51,7.92 29.51,4.75 30.48,4.75 30.48,0.91 29.87,0.3 16.74,0.3 14.2,2.84 14.2,4.7 15.06,5.77 16.38,5.77 16.77,5.23 19.94,5.23 21.92,7.21 21.92,10.21 22.86,11.15 22.56,11.15 21.92,10.52 21.92,12.32 23.11,13.51 28.45,13.51 ; 1 cut-out
GND on BOTTOM: 0.91,4.8 0.51,5.21 0.51,16.76 1.3,17.55 1.3,19 0.51,19.79 0.51,32.31 1.02,32.82 4.32,32.82 4.57,32.56 4.57,29.06 5.08,28.55 8.15,28.55 8.64,29.03 8.64,31.8 9.4,32.56 10.67,32.56 11.18,32.05 11.18,29.26 10.92,29.01 10.26,29.01 5.33,24.08 5.33,13.51 3.3,11.48 3.3,9.19 3.81,8.69 3.81,6.93 1.68,4.8 ; 4 cut-outs
GND on BOTTOM: 0.43,2.39 0.43,0.69 0.81,0.3 6.1,0.3 6.6,0.81 6.6,6.2 6.22,6.58 4.62,6.58
GND on BOTTOM: 19.3,15.04 17.78,15.04 17.53,14.78 17.53,13.77 17.78,13.51 19.3,13.51 19.56,13.77 19.56,14.78
GND on BOTTOM: 20.55,14.27 13.31,21.54 10.79,21.54 10.04,22.29 10.06,26.64 11.68,28.37 11.66,32.05 12.42,32.82 21.84,32.82 22.1,32.56 22.1,30.53 22.35,30.28 29.97,30.28 30.48,29.77 30.48,14.66 30.1,14.27 ; 10 cut-outs
GND on GND: 0.91,0.3 0.51,0.71 0.51,16.76 1.3,17.55 1.3,19 0.51,19.79 0.51,32.31 1.02,32.82 4.32,32.82 4.57,32.56 4.57,31.55 5.84,30.28 10.92,30.28 11.18,30.02 11.18,29.26 7.11,25.2 6.1,25.2 5.33,24.43 5.33,13.51 3.3,11.48 3.3,9.19 4.09,9.19 6.86,11.96 6.86,22.91 12.95,29.01 18.54,29.01 19.56,30.02 19.56,32.56 19.81,32.82 21.84,32.82 22.1,32.56 22.1,30.53 22.35,30.28 29.97,30.28 30.48,29.77 30.48,14.66 30.33,14.5 21.54,14.5 20.24,15.8 17.86,15.8 14.81,18.85 11.43,18.85 10.16,17.58 10.16,10.97 8.36,9.17 8.36,8.69 12.7,8.69 17.02,13 17.02,14.78 17.27,15.04 19.3,15.04 20.83,13.51 28.45,13.51 28.7,13.77 29.21,13.77 30.48,12.5 30.48,8.86 29.51,7.92 29.51,4.75 30.48,4.75 30.48,0.91 29.87,0.3
VBAT on TOP: 8.38,0.3 7.04,1.65 7.04,3.02 7.37,3.02 7.95,3.45 8.43,3.99 8.43,4.24 10.36,4.24 10.67,3.94 10.67,3.1 11.18,2.59 11.18,1.83 11.43,1.57 12.55,1.57 12.55,2.24 13.28,2.97 13.28,3.1 13.33,3.25 13.46,3.38 13.64,3.38 13.69,3.43 13.89,3.43 13.92,3.3 13.82,3.23 13.84,3.12 13.77,3 13.77,2.87 13.89,2.69 14.07,2.67 14.99,2.67 15.52,2.13 15.52,0.58 15.24,0.3
VBAT on BOTTOM: 7.37,32.56 6.1,32.56 5.33,31.8 5.33,29.26 5.59,29.01 7.87,29.01 8.13,29.26 8.13,31.8
VBAT on BOTTOM: 7.32,5.13 7.04,4.85 7.04,1.65 8.38,0.3 14.2,0.3 14.48,0.58 14.48,1.32 14.22,1.57 11.43,1.57 11.18,1.83 11.18,2.59 10.67,3.1 10.67,4.88 10.41,5.13
VBAT on POWER SOURCE: 1.02,32.82 8.38,32.82 9.91,31.29 9.91,27.74 6.86,24.69 6.86,18.59 3.84,15.6 3.81,10.97 5.33,9.45 9.14,9.45 10.31,10.62 10.31,15.01 12.23,16.92 15.65,16.92 16.05,16.59 16.05,10.77 12.19,6.91 11.18,6.91 10.67,6.4 10.67,3.1 11.18,2.59 11.18,1.83 11.45,1.56 15.24,1.58 15.49,1.32 15.49,0.56 15.24,0.3 8.38,0.3 5.84,2.84 5.84,5.13 5.33,5.64 1.68,5.64 0.51,6.81 0.51,16.74 1.3,17.55 1.3,19 0.51,19.79 0.51,32.31
VBUS on POWER SOURCE: 16.89,2.57 17.14,2.87 18.36,2.87 20.75,5.26 22.4,5.26 23.7,6.55 24.69,6.55 24.97,6.27 24.97,1.91 23.37,0.3 17.27,0.3 16.89,0.69
VCC_3V on TOP: 1.7,5.46 0.64,6.53 0.64,8.1 0.74,8.2 2.36,8.2 2.59,8.43 2.59,12.29 3.05,12.75 4.32,12.75 6.6,15.04 7.57,15.04 7.87,14.73 7.87,12.29 6.65,11.07 5.18,11.07 4.5,10.39 4.5,9.2 4.17,8.86 4.17,8.51 2.77,7.11 2.36,7.11 2.34,7.09 2.34,5.82 2.11,5.46
VCC_3V on POWER SOURCE: 4.6,15.04 4.6,11.3 5.66,10.24 8.69,10.24 9.22,10.77 9.22,15.27 13.08,19.13 16.46,19.13 18.05,17.54 18.02,9 17.2,8.18 17.2,6.78 17.86,6.12 21.97,6.12 22.91,7.06 28.3,7.06 29.62,8.38 29.62,11.79 27.53,13.87 27.53,17.04 26.87,17.5 24.56,17.5 24,18.06 24,21.29 20.73,24.51 20.73,28.78 18.53,31.04 14.15,31.04 7.67,24.56 7.67,18.14 4.72,15.19
OLED_VBAT on TOP: 13.46,7.42 13.21,7.16 13.21,6.15 13.46,5.89 14.25,5.89 14.48,6.12 14.48,7.16 14.22,7.42
OLED_VBAT on BOTTOM: 14.27,7.42 13.36,7.42 13.11,7.16 13.11,6.17 13.39,5.89 14.27,5.89 14.55,6.17 14.55,7.14
VDCDC on POWER SOURCE: 29.46,29.51 22.35,29.51 21.59,28.75 21.59,24.69 24.64,21.64 24.64,18.6 25.2,18.11 29.97,18.08 30.48,18.59 30.48,28.5 ; 1 cut-out
N650846 on TOP: 27.69,22.76 26.52,22.76 26.29,22.53 26.29,21.69 26.85,21.13 28.37,21.13 28.5,21.26 28.5,21.95

## Text on the board
Ref Des/Silkscreen Bottom: Prison God | Rev.Alpha | Designed by | ROCKEY.J
DEVICE_TYPE_BOTTOM: FIGURE | FINISHED_SIZE | 0.3 | DRILL CHART: TOP to BOTTOM | ALL UNITS ARE IN MILLIMETERS | ROTATION | - | PLATED | QTY | 337
PLACE_BOUND_TOP: FIGURE | FINISHED_SIZE | 1.55x0.45 | DRILL CHART: BOTTOM to BOTTOM | ALL UNITS ARE IN MILLIMETERS | ROTATION | 89.000 | PLATED | QTY | 2
User.6: 64*32 | 0.49
User.7: 3.7V | 55mAh
